# Altium PCB esp32.PcbDoc (part 2 of 2)
Units mil, origin at the board's own origin, x right, y up, seen from the top; angles counter-clockwise.
Board outline 804.97 x 1919.97 mil, 4 copper layers (Top Layer, VCC, GND, Bottom Layer), stack 51.1 mil thick; 76 components, 91 nets, 311 pads, 308 vias.
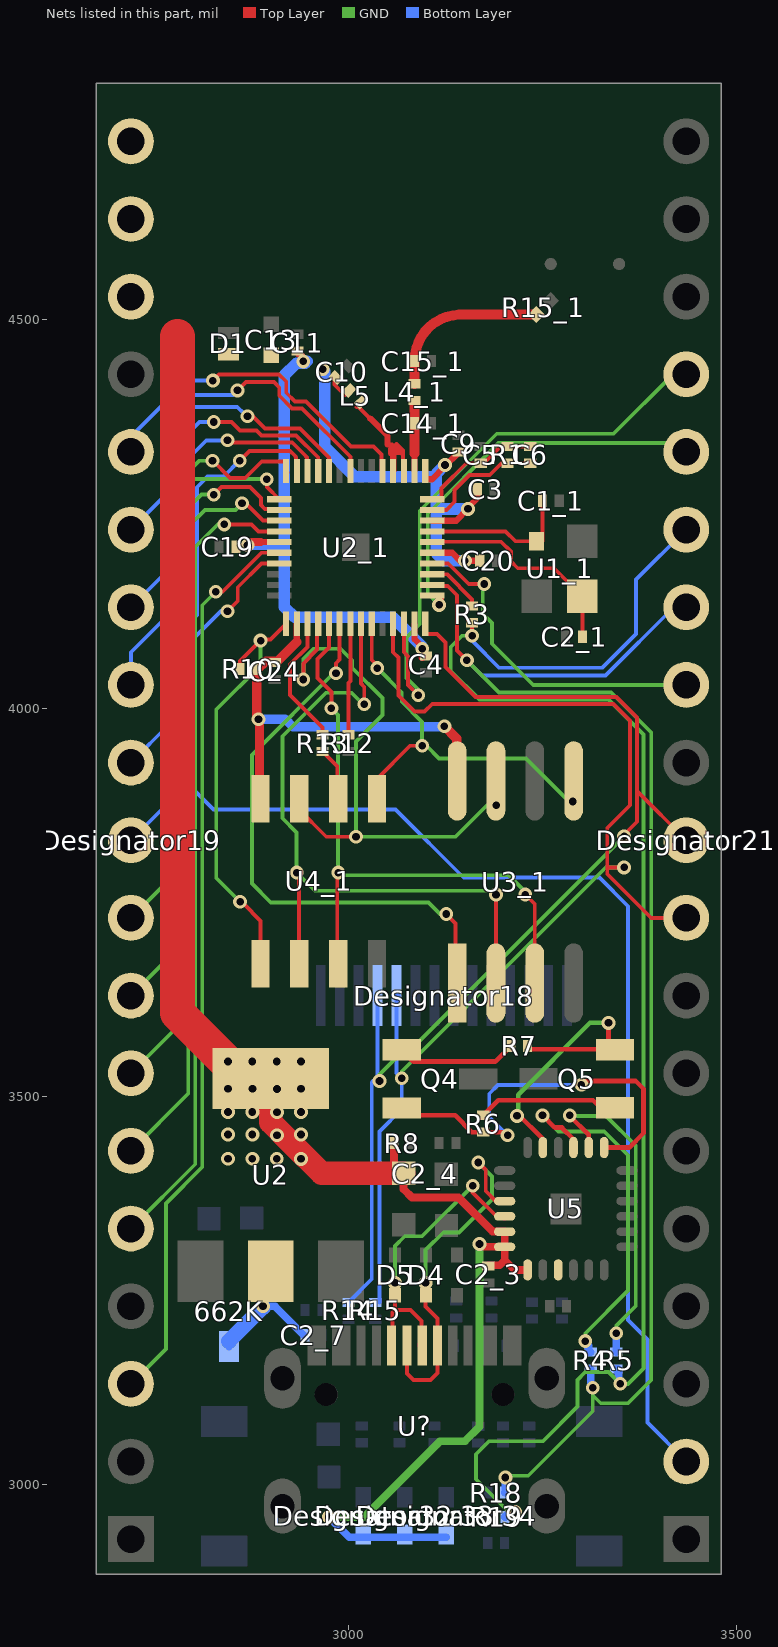
[diagram p4: the nets of this part, all layers, seen from the top]

## Via types
v1: diameter 17.72, hole 9.84, Top Layer to Bottom Layer, tented both sides, 308 vias

## Nets (pads, with @x,y where several pads share a name; then routed paths per layer and width w, separated by ;. In a path a pad name is that pad's centre, name@x,y a point inside that pad or via, vN(x,y) a via of type N, cw(c..) or ccw(c..) an arc to the next point about the centre after c; other vN are vias at no path point) (continued)
GPIO12: Designator19.5 U2_1.18 | length 1036
  Top Layer w5: v1(2840,4236.73) 2875.28,4236.73 2884.29,4227.73 U2_1.18@2910.96,4227.73
  GND w5: Designator19.5@2720,3330 2802.81,3412.81 2802.81,4207.81 2831.73,4236.73 v1(2840,4236.73)
GPIO13: Designator19.3 U2_1.20 | length 1173.7
  Top Layer w5: v1(2829.23,4150) v1@2829.49,4150 ; v1@2833.72,4145.77 v1@2829.49,4150 ; U2_1.20@2910.96,4200.17 2888.12,4200.17 2837.95,4150 v1@2829.49,4150
  GND w5: Designator19.3@2720,3130 2765,3175 2765,3362.27 2811.81,3409.08 2811.81,4132.58 v1(2829.23,4150)
GPIO14: Designator19.6 U2_1.17 | length 970
  Top Layer w5: v1@2860.71,4261.61 2870.09,4261.61 2890.19,4241.51 U2_1.17@2910.96,4241.51
  GND w5: Designator19.6@2720,3430 2793.81,3503.81 2793.81,4233.81 2815.29,4255.29 2854.39,4255.29 v1@2859.76,4260.66
  other v1: 2863.06,4263.96
GPIO15: Designator21.2 U2_1.21 | length 1723.7
  Top Layer w5: v1(2844.31,4125) 2857.43,4138.12 2857.43,4155.77 2888.05,4186.39 U2_1.21@2910.96,4186.39
  Bottom Layer w5: v1(2844.31,4125) 2835.69,4125 2800,4089.31 2800,3895.9 2826.34,3869.56 3060.56,3869.56 3148.46,3781.65 3182.81,3781.65 3183.02,3781.86 3323.14,3781.86 3360,3745 3360,3212.27 3385,3187.27 3385,3080 Designator21.2@3435,3030
GPIO16: R10.2 U2_1.25 U4_1.1 | length 554
  Top Layer w5: R10.2@2860.34,4050.68 2860.34,4060.82 2886.58,4087.06 v1(2886.91,4087.06) 2888.06,4088.31 2899.5,4088.31 U2_1.25@2919.82,4108.63 ; v1(2860.56,3750.81) 2863.06,3748.31 2864.82,3748.31 2886.87,3726.26 U4_1.1@2886.87,3670.76
  GND w5: v1(2860.56,3750.81) 2829.88,3781.49 2829.88,3998.19 2886.91,4055.22 v1(2886.91,4087.06)
GPIO17: R13.1 U2_1.27 | length 169.4
  Top Layer w5: U2_1.27@2947.38,4108.63 2947.38,4079.04 2925,4056.65 2925,4017 2966.81,3975.19 R13.1@2966.81,3965.83
GPIO18: Designator18.10 Designator21.9 R15.2 U2_1.35 | length 1585.4
  Top Layer w5: U2_1.35@3057.62,4108.63 3057.62,4072.13 3064.61,4065.14 3064.61,4016.17 3085.13,3995.65 3097.91,3995.65 3107.91,4005.65 3341.47,4005.65 3362.73,3984.39 3362.73,3875 3333.31,3845.58 3333.31,3795 ; v1(3355,3795) 3333.31,3795 ; Designator21.9@3435,3730 3390,3730 3333.31,3786.69 3333.31,3795
  GND w5: v1(3068.67,3523.44) 3068.67,3532.28 3331.39,3795 v1(3355,3795)
  Bottom Layer w5: R15.2@3040,3234.89 3040,3454.99 3068.67,3483.66 v1(3068.67,3523.44) 3061.98,3530.13 Designator18.10@3061.98,3630
GPIO19: Designator18.11 Designator21.10 R14.2 U2_1.38 | length 1468.7
  Top Layer w5: U2_1.38@3098.96,4108.63 3099.31,4108.63 3099.31,4095.43 3113.99,4095.43 3125,4084.42 3125,4053.3 3163.65,4014.65 3345.19,4014.65 3371.73,3988.12 3371.73,3893.27 ; v1@3355,3837.09 3371.73,3853.82 3371.73,3893.27 ; Designator21.10@3435,3830 3371.73,3893.27
  Top Layer w10: v1(3355,3835) v1@3355,3837.09
  GND w5: v1(3040,3520) 3040,3528.44 3071.56,3560 3080,3560 v1(3355,3835)
  Bottom Layer w5: R14.2@3000,3234.89 3030,3264.89 3030,3518.44 3031.56,3520 v1(3040,3520) 3038.82,3520 3035.39,3523.44 3037.57,3525.62 Designator18.11@3037.57,3630
GPIO21: Designator21.12 U2_1.42 | length 434.9
  Top Layer w5: U2_1.42@3107.82,4186.39 3128.64,4186.39 3155.03,4160 v1(3175,4160)
  GND w5: v1@3180,4160 3173.06,4153.06 3173.06,4121.94 3185,4110 3185,4083.06 3238.06,4030 Designator21.12@3435,4030
GPIO22: Designator21.15 U2_1.39 | length 517
  Top Layer w5: U2_1.39@3107.82,4145.05 3119.42,4145.05 3120.81,4143.66 3120.81,4137.06 v1(3116.81,4133.06)
  GND w5: v1(3116.81,4133.06) 3102.11,4147.76 3102.11,4250.46 3193.06,4341.41 3428.19,4341.41 Designator21.15@3430.97,4338.62
GPIO23: Designator21.16 U2_1.36 | length 766.5
  Top Layer w5: U2_1.36@3071.4,4108.63 3071.4,4072.08 3076.81,4066.66 3076.81,4029.84 v1(3090,4016.65)
  GND w5: v1(3090,4016.65) 3090,4024.12 3075,4039.12 3075,4091.29 3091.81,4108.1 3091.81,4254.3 3190.97,4353.46 3341.21,4353.46 3417.75,4430 Designator21.16@3435,4430
GPIO25: Designator19.9 U2_1.14 | length 757.6
  Top Layer w5: v1(2825,4318.77) 2825.31,4318.77 2847.43,4296.65 2867.21,4296.65 2888.37,4317.81 U2_1.14@2920,4317.81 ; U2_1.14@2919.82,4305.48 U2_1.14@2921.67,4303.64
  GND w5: Designator19.9@2720,3730 2761.81,3771.81 2761.81,4272.31 2808.27,4318.77 v1(2825,4318.77)
GPIO26: Designator19.8 U2_1.15 | length 836.4
  Top Layer w5: v1(2895,4295) 2895,4285.03 U2_1.15@2910.96,4269.06 U2_1.15@2899.02,4269.06
  GND w5: Designator19.8@2720,3630 2775,3685 2775,4267.88 2802.12,4295 v1(2895,4295)
GPIO27: Designator19.7 U2_1.16 | length 904.4
  Top Layer w5: v1(2826.63,4275) 2836.63,4285 2873.03,4285 2887.22,4270.82 2887.22,4261.81 2892.31,4256.72 2909.53,4256.72 U2_1.16@2910.96,4255.29
  GND w5: Designator19.7@2720,3530 2784.81,3594.81 2784.81,4248.77 2811.04,4275 v1(2826.63,4275)
GPIO32: Designator19.11 U2_1.12 | length 615.8
  Top Layer w5: v1@2839.45,4345 v1(2844.31,4345) ; v1@2844.31,4342.42 2927.67,4342.42 2945.54,4324.54 2945.54,4324.2 2946.81,4322.93 2946.81,4306.05 U2_1.12@2947.38,4305.48
  Bottom Layer w5: Designator19.11@2720,3930 2770,3980 2770,4105 2795,4130 2795,4323.06 2816.94,4345 v1(2844.31,4345)
GPIO33: Designator19.10 U2_1.13 | length 658.5
  Top Layer w5: v1(2860,4318.77) 2872.54,4331.31 2925,4331.31 2931.76,4324.54 2931.76,4323.84 2932.52,4323.08 2932.52,4306.56 U2_1.13@2933.6,4305.48
  Bottom Layer w5: Designator19.10@2720,3830 2785,3895 2785,4100 2805,4120 2805,4284.56 2818.75,4298.31 2839.54,4298.31 v1(2860,4318.77)
GPIO34: Designator19.13 U2_1.10 | length 512.2
  Top Layer w5: v1(2870,4376.14) 2870,4378.91 2872.14,4381.06 2892.78,4360.42 2937.61,4360.42 2974.94,4323.09 U2_1.10@2974.94,4305.48
  Bottom Layer w5: Designator19.13@2720,4130 2774.47,4184.47 2774.47,4366.53 2796.09,4388.15 2856.85,4388.15 v1@2865,4380
GPIO35: Designator19.12 U2_1.11 | length 568
  Top Layer w5: v1(2826.63,4368.68) 2849.48,4368.68 2860.44,4357.72 2881.61,4357.72 2887.91,4351.42 2932.47,4351.42 2961.16,4322.72 U2_1.11@2961.16,4305.48
  Bottom Layer w5: Designator19.12@2720,4030 2720,4072.06 2785,4137.06 2785,4345.62 2808.05,4368.68 v1(2826.63,4368.68) v1@2826.63,4372.15
LNA_IN: C14_1.2 L4_1.1 U2_1.2 | length 92.4
  Top Layer w8: U2_1.2@3085.18,4305.48 3085.18,4328.11
  Top Layer w12: L4_1.1@3085.18,4393.54 L4_1.1@3085.18,4396.23
  Top Layer w13: 3085.18,4328.11 C14_1.2@3085.18,4367.06 ; C14_1.2@3085.18,4368.67 C14_1.2@3085.18,4367.06 ; L4_1.1@3085.18,4393.53 3085.18,4368.68 C14_1.2@3085.18,4367.06
N16680112: L5.1 U2_1.3 U2_1.4 | length 188.1
  Top Layer w5.2: 3050.41,4339.87 3056.05,4339.87 3058.68,4337.23 ; 3054.82,4331.54 3054.82,4333.37 3056.89,4335.44 3058.68,4337.23 ; U2_1.3@3071.4,4317.45 3070.08,4318.77 3070.08,4325.84 ; 3058.68,4337.23 3061.91,4340.27 3067.74,4334.44 3070.08,4332.1 3070.08,4325.84 ; 3058.68,4337.23 3059.14,4336.78 ; 3058.68,4337.23 3059.14,4336.78 ; 3059.14,4336.78 3064.61,4331.31 3070.08,4325.84
  Top Layer w5.3: 3010.72,4388.15 3012.9,4388.15 3027.9,4373.15
  Top Layer w7.8: U2_1.3@3071.4,4305.48 U2_1.3@3071.4,4317.45
  Top Layer w8: 3027.9,4373.15 3050.41,4350.65 3050.41,4339.87 ; 3054.82,4333.37 3054.82,4328.49 3057.62,4325.69 ; U2_1.4@3057.62,4305.48 3057.62,4325.69 ; 3059.24,4333.1 3057.62,4331.48 3057.62,4325.69
  Top Layer w10: 3056.24,4331.31 3064.61,4331.31
N16680176: C5.1 C6.2 R1.2 U2_1.48 | length 163.1
  Top Layer w5: U2_1.48@3107.82,4269.06 3119.69,4269.06 3119.69,4283.44 3151.73,4315.48 C5.1@3170.56,4315.48 3174.37,4315.48 3196.02,4337.13 R1.2@3205,4337.13 C6.2@3234.31,4337.13
N16680244: C2_1.1 U1_1.3 U2_1.44 | length 282.5
  Top Layer w5: U2_1.44@3107.82,4213.95 3113.01,4213.95 3113.42,4214.36 3196.73,4214.36 3209.17,4201.92 3209.17,4189.09 3218.06,4180.2 3264.77,4180.2 3300.76,4144.21 U1_1.3@3301.37,4144.21 ; C2_1.1@3301.39,4092.06 U1_1.3@3301.37,4144.21
N16680316: C1_1.1 U1_1.1 U2_1.45 | length 199.2
  Top Layer w5: U2_1.45@3107.82,4227.73 3202.39,4227.73 3215.04,4215.08 U1_1.1@3242.31,4215.08 3249.75,4215.08 C1_1.1@3249.75,4267.06
N16680498: C6.1 R1.1 U2_1.47 | length 160.3
  Top Layer w5: U2_1.47@3107.82,4255.29 3126.1,4255.29 3136.65,4265.84 3136.65,4280.99 3156.05,4300.4 3182.01,4300.4 3197.09,4315.48 R1.1@3205,4315.48 C6.1@3234.31,4315.48
N16681146: R3.1 U2_1.41 | length 73.4
  Top Layer w5: U2_1.41@3107.82,4172.61 3126.81,4172.61 3159.31,4140.11 R3.1@3159.31,4131.63
N16707690: 
NETR6_1: 
NETR10_1: 
NETR12_1: 
R7_1: Q4.2 R6.1 U5.19 | length 558.8
  Top Layer w6: Q4.2@3068.67,3485.2 3059.13,3475.66 3137.4,3475.66 3158.89,3454.17 R6.1@3173.76,3454.17 3200.83,3454.17 v1(3205,3450) ; v1(3300,3515) 3305,3520 3370,3520 3380,3510 3380,3452.5 3361.74,3434.24 U5.19@3329.21,3434.24
  Bottom Layer w5: v1(3205,3450) 3181.39,3473.61 3181.39,3503.58 3192.81,3515 v1(3300,3515)
R7_2: Q5.1 R6.2 | length 189.3
  Top Layer w6: R6.2@3173.76,3475.83 3192.94,3495 3315,3495 3333.85,3476.15 Q5.1@3343.34,3485.63
R11_1: Q4.1 R7.1 | length 155
  Top Layer w6: Q4.1@3068.67,3560 3083.67,3545 3189.17,3545 R7.1@3209.17,3565
R11_2: Q5.2 R7.2 U5.23 | length 396.6
  Top Layer w6: v1@3218.93,3476.86 3249.75,3446.04 3249.75,3433.51 U5.23@3250.47,3434.24 ; R7.2@3230.56,3560.86 Q5.2@3336.92,3560.86 ; v1(3335,3594.81) 3335,3562.79 Q5.2@3336.92,3560.86 ; Q5.2@3336.92,3560.86 3340,3557.79 3342.99,3560.77 3343.07,3560.86 Q5.2@3336.92,3560.86
  GND w6: v1@3218.54,3473.54 3218.54,3502.23 3311.12,3594.81 v1(3335,3594.81)
  other v1: 3217.07,3475
RF_ANT: C15_1.2 L4_1.2 R15_1.1 | length 220.3
  Top Layer w13: L4_1.2@3085.18,4417.88 3085.18,4422.47 C15_1.2@3085.18,4447.06 cw(c3145.03,4447.06) 3142.72,4506.86 3216.21,4506.86 R15_1.1@3242.16,4506.86
RI: 
RTS: 
RXD0: R4.2 U5.21 | length 475
  Top Layer w6: v1(3250,3475.66) 3265.66,3460 3275,3460 3289.84,3445.16 U5.21@3289.84,3434.24
  GND w5: v1(3250,3475.66) 3270.66,3455 3329.4,3455 3360,3424.4 3360,3250 3305,3195 v1(3305,3185)
  Bottom Layer w10: v1(3305,3185) 3305,3182.91 3309.13,3178.79 3309.13,3171.73 3310.03,3170.83 R4.2@3312,3170.83
SCK/CLK: R12.1 U2_1.31 | length 144
  Top Layer w5: R12.1@3000,3965.83 3000,4032.5 3002.77,4035.27 U2_1.31@3002.77,4108.63
SCS/CMD: U2_1.30 U3_1.1 | length 747.5
  Top Layer w5: v1(2984.02,4045) 2984.02,4057.95 2988.72,4062.65 U2_1.30@2988.72,4108.63 ; v1(3126.1,3735) 3138.06,3723.04 U3_1.1@3138.06,3649.71 ; U3_1.1@3139.31,3675.75 U3_1.1@3145.4,3669.65
  GND w5: v1@2982.45,4046.57 2875.86,3939.98 2875.86,3774.14 2900,3750 3103.11,3750 3118.11,3735 v1(3126.1,3735)
SDI/SD1: U2_1.33 U3_1.5 U4_1.5 | length 517
  Top Layer w5: U2_1.33@3030.06,4108.63 3030.06,4062.33 3037.3,4055.09 v1(3037.3,4051.65) ; U4_1.5@3035.56,3883.36 3035.56,3907.82 3079.4,3951.65 v1(3095,3951.65)
  GND w5: v1(3037.3,4051.65) 3068.67,4020.28 3068.67,4008.79 3095,3982.46 v1(3095,3951.65) 3100.58,3951.65 3116.81,3935.42 3228.45,3935.42 3289.11,3874.75 v1(3289.11,3879.88)
SDO/SD0: U2_1.32 U3_1.2 U4_1.2 | length 873.3
  Top Layer w5: v1(2933.39,3788.31) 2936.56,3785.14 U4_1.2@2936.56,3692.65 ; U2_1.32@3016.28,4108.63 3016.02,4108.37 3016.02,4031.91 3020.41,4027.52 v1(3020.41,4005) ; U3_1.2@3189.31,3675.75 3190,3676.44 v1(3190,3760)
  GND w5: v1(2933.39,3788.31) v1@2933.39,3788.42 ; v1(3020.41,4005) 3019.12,4005 3004.12,4020 2971.25,4020 2915.11,3963.86 2915.11,3858.28 2933.39,3840 v1@2933.39,3788.42 ; v1(3190,3760) 3185,3765 2956.81,3765 v1@2933.39,3788.42
SENSOR_VN: Designator19.14 U2_1.8 | length 481.3
  Top Layer w5: v1(2857.23,4409.31) 2867.92,4420 2904.16,4420 2911,4413.16 2911,4402.49 2927.29,4386.2 2940.11,4386.2 3002.5,4323.81 U2_1.8@3002.5,4305.48
  Bottom Layer w5: Designator19.14@2720,4230 2765,4275 2765,4370 2798.46,4403.46 2851.38,4403.46 v1(2857.23,4409.31)
SENSOR_VP: Designator19.15 U2_1.5 | length 462.5
  Top Layer w5: v1@2823.98,4421.9 v1(2825.48,4421.9) 2833.58,4430 2910.56,4430 2920,4420.56 2920,4406.22 2931.02,4395.2 2945.26,4395.2 3003.23,4337.23 3032.07,4337.23 3042.65,4326.65 3042.65,4317.81 3042.65,4306.67 U2_1.5@3043.84,4305.48 U2_1.5@3043.84,4317.81
  Bottom Layer w5: Designator19.15@2720,4330 2720,4350 2791.9,4421.9 v1(2825.48,4421.9)
SHD/SD2: U2_1.28 U3_1.7 U4_1.7 | length 737.1
  Top Layer w5: U4_1.7@2935.56,3870.49 2971.49,3834.56 v1(3009.73,3834.56) ; v1(2941.93,4037.06) 2941.93,4057.85 2959.72,4075.64 2959.72,4108.63 U2_1.28@2961.16,4108.63 ; U3_1.7@3189.31,3885.81 3190.97,3884.15 3190.33,3883.51 v1(3190.33,3875)
  GND w5: v1(2941.93,4037.06) 2941.93,4063.59 2955,4076.65 2990,4076.65 3005,4061.65 3005,4052.06 3043.84,4013.22 3043.84,3991.1 3009.73,3956.99 v1(3009.73,3834.56) 3138.06,3834.56 3178.5,3875 v1(3190.33,3875)
SRAM_CLK: R13.2 U4_1.6 | length 68.6
  Top Layer w5: R13.2@2966.81,3944.17 2985.56,3925.42 U4_1.6@2985.56,3883.36
SWP/SD3: U2_1.29 U3_1.3 U4_1.3 | length 790.6
  Top Layer w5: U2_1.29@2974.94,4108.63 2974.94,4078.13 2960,4063.19 2960,4038.99 2978.12,4020.87 v1(2978.12,4000) ; U4_1.3@2985.56,3683.75 2985.56,3787.06 v1(2986.81,3788.31) ; v1(3227.87,3760) 3240,3747.87 3240,3676.44 U3_1.3@3239.31,3675.75
  GND w5: v1(2978.12,4000) 2986.81,3991.31 v1(2986.81,3788.31) ; v1@2986.81,3785 3206.31,3785 3231.31,3760 v1(3227.87,3760)
TXD0: R5.1 U5.20 | length 428.8
  Top Layer w6: v1@3284.73,3475.39 3309.53,3450.6 U5.20@3309.53,3434.24
  GND w5: v1(3285,3475.66) 3285.66,3475 3331.78,3475 3370,3436.78 3370,3230 3345,3205 v1(3345,3195)
  Bottom Layer w10: R5.1@3345,3170.83 v1(3345,3195)
U0RXD: Designator21.13 R4.1 R18.1 U2_1.40 | length 1884
  Top Layer w5: U2_1.40@3107.82,4158.83 3109.09,4157.56 3127.92,4157.56 3140,4145.47 3140,4074.21 v1(3152.56,4061.65)
  GND w5: v1(3152.56,4061.65) 3193.94,4020.28 3338.51,4020.28 3390,3968.79 3390,3135 3360,3105 3325,3105 3314.69,3115.31 ; v1@3204.36,3011.59 3231.59,3011.59 3314.69,3094.69 3314.69,3115.31 ; v1(3314.69,3125) 3314.69,3115.31
  GND w10: v1(3202.16,3009.4) v1@3204.36,3011.59
  Bottom Layer w5: v1(3152.56,4061.65) 3172.16,4042.06 3330.95,4042.06 3418.9,4130 Designator21.13@3435,4130
  Bottom Layer w10: R18.1@3201.26,2990 3202.16,2990.91 v1(3202.16,3009.4) ; R4.1@3312,3149.17 3312,3122.31 v1(3314.69,3125)
U0TXD: Designator21.14 R3.2 R5.2 R19.1 | length 2022.8
  Top Layer w5: v1(3159.31,4093.31) R3.2@3159.31,4109.98
  GND w5: v1(3159.31,4093.31) 3146.37,4093.31 3131.81,4078.75 3131.81,4048.19 3168.72,4011.28 3334.79,4011.28 3380,3966.06 3380,3150 3360,3130 v1(3350,3130) 3335,3145 3305,3145 3295,3135 3295,3100.7 3250.36,3056.06 3181.06,3056.06 3164.39,3039.39 3164.39,3007.1 3206.49,2965 v1(3215,2965)
  Bottom Layer w5: v1(3159.31,4093.31) 3159.31,4087.06 3194.31,4052.06 3326.81,4052.06 3370.56,4095.81 3370.56,4165.56 Designator21.14@3435,4230
  Bottom Layer w10: R19.1@3201.54,2958.58 3207.96,2965 v1(3215,2965) ; R5.2@3345,3149.17 3346.97,3149.17 3347.87,3148.27 3347.87,3134.21 3350,3132.09 v1(3350,3130)
U5_5: 
U5_9: U5.9
USBD+: D4.1 U5.3 U?.A6 U?.B6 | length 485
  Top Layer w5: U?.A6@3075.34,3179.21 3075.34,3143.33 3083.67,3135 3105.72,3135 3114.71,3143.99 U?.B6@3114.71,3179.21 3114.71,3214.21 3099.31,3229.62 v1(3099.31,3260) ; v1(3167.07,3415) 3176.93,3405.14 3176.93,3378.07 3189.46,3365.54 U5.3@3201.07,3365.54
  GND w5: v1(3099.31,3260) 3099.31,3302.2 3122.11,3325 3142.52,3325 3185,3367.48 3185,3397.07 v1(3167.07,3415)
USBD-: D5.1 U5.4 U?.A7 U?.B7 | length 397.2
  Top Layer w5: U?.B7@3056.56,3180.12 3056.56,3222.08 3059.48,3225 ; v1(3060,3260) D5.1@3060,3244.02 3060,3225.52 3059.48,3225 ; U?.A7@3094.12,3180.12 3094.12,3210.88 3080,3225 3059.48,3225 ; v1(3160,3385) 3160,3376.54 3190.69,3345.84 U5.4@3201.07,3345.84
  Top Layer w10: U?.B7@3055.65,3179.21 U?.B7@3056.56,3180.12 ; U?.A7@3094.12,3180.12 U?.A7@3095.02,3179.21 ; U5.4@3201.07,3345.84 U5.4@3201.26,3345.65
  GND w5: v1(3060,3260) 3060,3307.38 3072.62,3320 3095,3320 v1(3160,3385)
VBUS: 
VDD3V3: 
VDD33: 662K.3 C2_3.2 C2_4.2 C2_7.2 C3.1 C4.1 C9.1 C10.1 C11.1 C13.1 C19.1 C20.1 D1.1 Designator19.17 Designator19.18 Designator19.19 Designator32.1 Designator33.1 Designator34.1 L5.2 R8.1 U2.2 U2.4 U2_1.1 U2_1.19 U2_1.37 U2_1.43 U2_1.46 U5.5 U5.6 U5.7 | length 3819.9
  Top Layer w5: C11.1@2934.31,4454.98 2941.38,4454.98 2941.38,4447.2 v1(2941.93,4446.65) ; C10.1@2982.9,4421.9 2981.81,4420.81 2981.81,4417.06 2995.4,4403.46
  Top Layer w8: 2887.05,4213.95 U2_1.19@2910.96,4213.95 ; U2_1.37@3085.18,4108.63 3085.18,4088.76 3095,4078.94 v1(3095,4076.65) ; U2_1.1@3098.96,4305.48 3098.96,4294.88 3107.8,4294.88 v1@3123.63,4310.71 ; U2_1.43@3107.82,4200.17 3133.7,4200.17 3145.56,4188.31 3147.25,4190 v1(3150,4190) 3150,4188.87 3151.13,4190 C20.1@3169.17,4190 ; U2_1.46@3107.82,4241.51 3138.82,4241.51 v1(3153.97,4256.65) 3153.06,4257.56 3165.98,4270.48 C3.1@3165.98,4282.06 ; C9.1@3141.81,4329.98 3141.79,4328.87 v1@3124.31,4311.39 ; v1@3123.63,4310.71 v1(3124.31,4313.31) v1@3124.31,4311.39 ; v1@3123.63,4310.71 v1@3124.31,4311.39
  Top Layer w10: C19.1@2857.85,4208.32 v1(2870,4210) 2870.28,4213.95 2887.05,4213.95 ; U2.4@2864.57,3523.03 U2.4@2900,3523.03 ; R8.1@3058.68,3440 3058.68,3413.41 C2_4.2@3071.1,3401 3071.1,3380.71 3081.81,3370 3141.83,3370 3185.66,3326.17 3201.06,3326.17 U5.5@3201.26,3325.97 U5.6@3201.26,3306.29 ; C4.1@3095,4065.94 v1(3095,4076.65) ; v1(3168.72,3310) 3170.81,3310 3174.33,3306.48 3201.07,3306.48 U5.6@3201.26,3306.29 ; C2_3.2@3180,3281.65 3180.91,3282.56 3194.81,3282.56 3201.26,3289 ; U5.7@3230.78,3276.76 3213.5,3276.76 3201.26,3289 ; 3201.26,3289 U5.6@3201.26,3306.29
  Top Layer w30: U2.4@2900,3523.03 2900,3480 2900,3466.67 2927.33,3439.34 2965.67,3401 C2_4.2@3071.1,3401
  Top Layer w45: 2780,4478.46 2780,3607.6 2843.8,3543.8 U2.4@2864.57,3523.03
  GND w10: v1(2975,2958.58) 3020.41,2958.58 3117.89,3056.06 3150.02,3056.06 3168.72,3074.76 v1(3168.72,3310)
  Bottom Layer w10: 662K.3@2846.22,3178.07 662K.3@2846.22,3184.96 ; v1@2890,3228.74 v1(2890,3229.81) 2905.3,3229.81 C2_7.2@2942.42,3192.69 ; v1(2975,2958.58) 3001.08,2932.5 Designator34.1@3125.72,2932.5
  Bottom Layer w12: v1@2870.56,4210 2917.51,4210
  Bottom Layer w15: v1(2941.93,4446.65) 2946.75,4446.65 v1@2944.48,4444.39 ; v1@2942,4444.39 2933.09,4444.39 2917.51,4428.81 2917.51,4210 2917.51,4130.36 2930.81,4117.06 3056.94,4117.06 3095,4079 v1(3095,4076.65) ; v1(2966.81,4436.65) 2969.31,4434.15 2969.31,4417.08 2969.31,4337.06 3008.06,4298.31 3113.06,4298.31 ; v1(3124.31,4313.31) 3113.06,4302.06 3113.06,4298.31 ; v1(3150,4190) 3122.68,4190 3113.06,4199.62 3113.06,4258.06 ; v1(3153.97,4256.65) 3114.46,4256.65 3113.06,4258.06 ; 3113.06,4258.06 3113.06,4298.31
  Bottom Layer w20: 662K.3@2846.22,3184.96 v1@2890,3228.74
  other v1: 2845,3420 2876.34,3420 2907.69,3420 2939.03,3419.68 2908.07,3450 2845,3451.04 2876.34,3451.04 2939.03,3451.04 2845,3480 2876.34,3480 2908.07,3479.62 2939.03,3480 2845,3510 2876.47,3510 2908.07,3509.65 2939.03,3510 2845,3545 2876.34,3545 2907.69,3545 2939.03,3545
VDD_SDIO: C24.1 R10.1 U2_1.26 U3_1.8 U4_1.8 | length 550.6
  Top Layer w8: 2933.6,4085.26 U2_1.26@2933.6,4108.63
  Top Layer w12: U4_1.8@2885.56,3883.36 v1@2885.56,3984.56 ; 2933.6,4085.26 2909.16,4060.82 2893.9,4060.82 2882.01,4048.93 2882.01,3991.85 2885.56,3988.31 v1@2885.56,3985.81 ; v1(3123.63,3976.65) 3139.31,3960.97 U3_1.8@3139.31,3936 ; v1@2885.56,3984.56 v1@2885.56,3985.81 ; v1@2885.56,3984.56 v1(2884.31,3985.81) v1@2885.56,3985.81
  Bottom Layer w12: v1(2884.31,3985.81) 2918.85,3985.81 2928.36,3976.3 3123.27,3976.3 v1(3123.63,3976.65)
VDDUSB: 
pads on no net: Designator30.MH1 Designator30.MH2 Designator31.MH1 Designator31.MH2 Designator32.2 Designator33.2 Designator34.2 R18.2 R19.2 R20.2 U2_1.6 U2_1.7 U5.1 U5.10 U5.11 U5.12 U5.13 U5.14 U5.15 U5.16 U5.17 U5.18 U5.22 U5.24 U?. U?.A8 U?.B8
copper on no net: | length 396.2
  Bottom Layer w5: 3018.82,2981.08 3039.89,2960 3149.31,2960 3160,2949.31 3160,2933.39 3168.39,2925 3179.5,2925 ; 3072.39,2984.08 3072.39,2999.46 3082.93,3010 3159.61,3010 3179.61,2990 ; 3125.72,2984.08 3145.92,2984.08 3171.42,2958.58 3179.88,2958.58
  Bottom Layer w10: 3018.82,2981.08 3018.82,2984.08

## Polygon pours and split planes (outlines as drawn)
VDD33 on Top Layer "Top Layer-VDD33" (solid, pour order 0): 2978.12,3565 2978.12,3480 2981.27,3476.86 3032.07,3476.86 3032.07,3429.55 2930,3327.48 2930,3220 2869.95,3220 2870.28,3325.97 2869.03,3325.97 2770,3425 2770,3480 2818.98,3480 2823.98,3485 2823.98,3565
GND on Top Layer "Top Layer-GND" (solid, pour order 4): 2670,4810 3485,4810 3485,2880 2670,2880
+5V on Top Layer "+5V_L01_P002" (solid, pour order 2): 3056.56,3095 3068.67,3082.88 3068.67,2942.98 3055.7,2930 2795,2930 2770,2955 2770,3060 2750,3080 2690,3080 2670,3060 2670,2880 3485,2880 3485,2965 3470,2980 3399.31,2980 3399.31,2979.31 3385,2965 3385,2950 3365,2930 3128.69,2930 3113.69,2945 3113.69,3085.06 3123.63,3095 3148.97,3095 3190.97,3137 3190.97,3195 3169.17,3195 3169.17,3147.5 3136.67,3115 3033.4,3115 3008.4,3140 3000.9,3147.5 3000.9,3215.76 3020.41,3235.28 3020.41,3315.41 3025,3320 3086.39,3320 3086.39,3350 2989.72,3350 2959.72,3320 2960,3235.28 2979.69,3215.58 2979.69,3136.33 3021.02,3095
GND on Bottom Layer "Bottom Layer-GND" (solid, pour order 20): 2670,4810 3485,4810 3485,2880 2670,2880
VDD33 on Bottom Layer "Bottom Layer-VDD33" (solid, pour order 6): 2805,3565 2978.12,3565 2978.12,3380 2839.04,3380 2805,3414.04
GND on VCC "VCC-GND" (solid, pour order 12): 2670,4815 3485,4815 3485,2880 2670,2880
VDD33 on VCC "VDD33_L02_P008" (solid, pour order 8): 2823.63,3565 2824.88,3566.25 2965,3566.25 2965,3398.16 2961.84,3395 2823.63,3395
GND on GND "GND-GND" (solid, pour order 18): 2670,4810 3485,4810 3485,2880 2670,2880
VDD33 on GND "GND-VDD33" (solid, pour order 16): 2823.63,3565 2824.88,3566.25 2965,3566.25 2965,3398.16 2961.84,3395 2823.63,3395

## Other copper
Top Layer:
  pour cut-out: 3137.01,4524.8 3137.2,4525 3230.76,4525 3239.77,4534.01 3239.77,4575 3281.36,4575 3281.36,4508.37 3259.17,4486.19 3142.97,4486.19 ccw(c3144.48,4447.06) 3105.32,4447.06 3065.52,4447.06 cw(c3138.48,4451.71)
  pour cut-out: 3065.24,4450
  pour cut-out: 3065.24,4313.16 3064.41,4312.34 3104.92,4312.34 3104.92,4453.4 3098.9,4459.42 3089.49,4450 3065.24,4450
  pour cut-out: 2919.82,4305.48 2919.82,4277.92 2910.96,4269.06 2910.96,4117.49 2919.82,4108.63 3098.96,4108.63 3098.96,4136.19 3107.82,4145.05 3107.82,4296.62 3098.96,4305.48
  pour cut-out: 3201.26,3404.72 3201.26,3306.28 3230.78,3276.76 3329.22,3276.76 3358.74,3306.28 3358.74,3404.71 3329.21,3434.24 3230.79,3434.24
  pour cut-out: 2665,4818.48 2665,4575 3490,4575 3490,4831.69
  pour cut-out: 3260.56,4203.98 3260.56,4187.28 3266.81,4187.28 3266.81,4203.98
  pour cut-out: 3193.06,4241.85 3193.06,4227.12 3229.56,4227.12 3229.56,4241.85
  region net GND: 3319.58,4554.5 3372.59,4554.5 3372.59,4508.38 3319.58,4508.38
  region net N16680112: 3053.51,4329.04 3070.08,4329.04 3070.08,4349.33 3053.29,4366.11 3053.29,4373.36 3020.41,4406.24 3003.55,4389.38 3027.9,4365.03 3027.9,4354.64
  region net VDD33: 2795.17,4440.18 2795.67,4439.68 2795.67,4430 2799.04,4430 2810,4440.18 2954.16,4440.18 2997.05,4397.3 3011.81,4412.06 2957.43,4466.43 2824.93,4466.43 2750,4541.37 2750,4745 2745,4750 2700,4750 2685,4735 2685,4510 2720,4480 2755,4466.43
VCC:
  pour cut-out: 2660,4818.4 2660,4575 3384.5,4575 3384.5,4830
GND:
  pour cut-out: 2660,4818.4 2660,4575 3495,4575 3495,4825 3488.34,4831.66
Bottom Layer:
  pour cut-out: 3122.6,3585.13 3147.82,3585.13 3147.82,3674.87 3122.6,3674.87
  pour cut-out: 2665,4818.48 2665,4575 3490,4575 3490,4831.69
  region net VDD33: 2954.73,4431.65 2969.31,4417.08 2972.23,4417.08 2976.81,4421.65 2976.81,4446.65 2957.03,4466.43 2934.09,4466.43 2910,4442.34 2910,4419.56 2925,4419.56 2925,4424 2932.66,4431.65
Multi-Layer:
  lines w1: 3422.97,4807.06 3423,4807.06

## Silkscreen, mask and mechanical layers (free items; w line width, h text height)
Top Overlay:
  text "V" at 2785,4750 h40 r270
  text "G" at 3365,4715 h40 r90
  text "V" at 2785,4645 h40 r270
  text "G" at 3363.7,4616 h40 r90
  text "V" at 2785,4545 h40 r270
  text "G" at 3365,4515 h40 r90
  text "EN" at 2784.8,4460 h40 r270
  text "23" at 3365,4400 h40 r90
  text "VP" at 2784.8,4359.31 h40 r270
  text "22" at 3363.7,4300 h40 r90
  text "VN" at 2784.8,4265 h40 r270
  text "TX" at 3363.7,4196.79 h40 r90
  text "34" at 2784.8,4159.31 h40 r270
  text "RX" at 3363.7,4100 h40 r90
  text "35" at 2784.8,4059.31 h40 r270
  text "21" at 3363.7,4010 h40 r90
  text "32" at 2784.8,3959.31 h40 r270
  text "G" at 3365,3915 h40 r90
  text "33" at 2784.8,3859.31 h40 r270
  text "19" at 3363.7,3805 h40 r90
  text "25" at 2784.8,3759.31 h40 r270
  text "18" at 3364.65,3700 h40 r90
  text "26" at 2784.8,3659.31 h40 r270
  text "5" at 3363.7,3620 h40 r90
  text "27" at 2784.8,3559.31 h40 r270
  text "G" at 3363.7,3513.8 h40 r90
  text "14" at 2784.8,3459.31 h40 r270
  text "G" at 3365,3411.88 h40 r90
  text "12" at 2790,3360 h40 r270
  text "4" at 3363.7,3313.8 h40 r90
  text "G" at 2783.62,3218.98 h40 r270
  text "0" at 3365,3215 h40 r90
  text "13" at 2784.8,3164.31 h40 r270
  text "2" at 3363.7,3120 h40 r90
  text "5V" at 2783.62,3049.31 h40 r270
  text "15" at 3363.7,3000 h40 r90
  text "5V" at 2784.45,2959.31 h40 r270
  text "5V" at 3363.7,2895 h40 r90
Bottom Overlay:
  drawing of 191 lines, arcs and shapes, not listed
  text "G" at 3365,4745.7 h40 r90
  text "V" at 2785,4718.22 h40 r270
  text "G" at 3370,4647.9 h40 r90
  text "V" at 2785,4615 h40 r270
  text "G" at 3370,4545.7 h40 r90
  text "V" at 2785,4520 h40 r270
  text "ESP32 V1.2" at 3254.1,4502.46 h40
  text "23" at 3370,4460.7 h40 r90
  text "EN" at 2785,4400 h40 r270
  text "22" at 3370,4360.7 h40 r90
  text "VP" at 2785,4300 h40 r270
  text "TX" at 3370,4260.7 h40 r90
  text "VN" at 2785,4195 h40 r270
  text "RX" at 3370,4160.7 h40 r90
  text "34" at 2785,4100 h40 r270
  text "21" at 3370,4050.7 h40 r90
  text "35" at 2785,4000 h40 r270
  text "G" at 3370,3945.7 h40 r90
  text "32" at 2785,3900 h40 r270
  text "19" at 3370,3855.7 h40 r90
  text "33" at 2785,3800 h40 r270
  text "18" at 3370,3760.7 h40 r90
  text "25" at 2785,3700 h40 r270
  text "5" at 3370,3640.7 h40 r90
  text "26" at 2785,3600 h40 r270
  text "G" at 3370,3545.7 h40 r90
  text "27" at 2785,3505 h40 r270
  text "G" at 3370,3455.7 h40 r90
  text "14" at 2829.49,3440 h40
  text "12" at 2829.49,3384.72 h40
  text "4" at 3370,3345.7 h40 r90
  text "0" at 3370,3244.44 h40 r90
  text "G" at 2745,3203.71 h40
  text "2" at 3370,3130.7 h40 r90
  text "13" at 2775,3115 h40 r270
  text "15" at 3372.2,3060.7 h40 r90
  text "5V" at 2786.18,2990 h40 r270
  text "5V" at 3372.2,2965.7 h40 r90
  text "5V" at 2785.36,2900 h40 r270
Mechanical 1:
  lines w10: 2670,2880 3485,2880 ; 2670,2880 2670,2880 ; 2670,2880 2670,4780 2670,4810 3485,4810 3485,2880 ; 3485,2880 3485,2880

## Text inside footprints (layer, text, board x,y; h text height)
Designator18: Bottom Overlay "OLED 0.91'" at 3139.34,4464.72 h80 r90